# EAGLE board Breakout Board PCB (EAGLE 9.7.0)
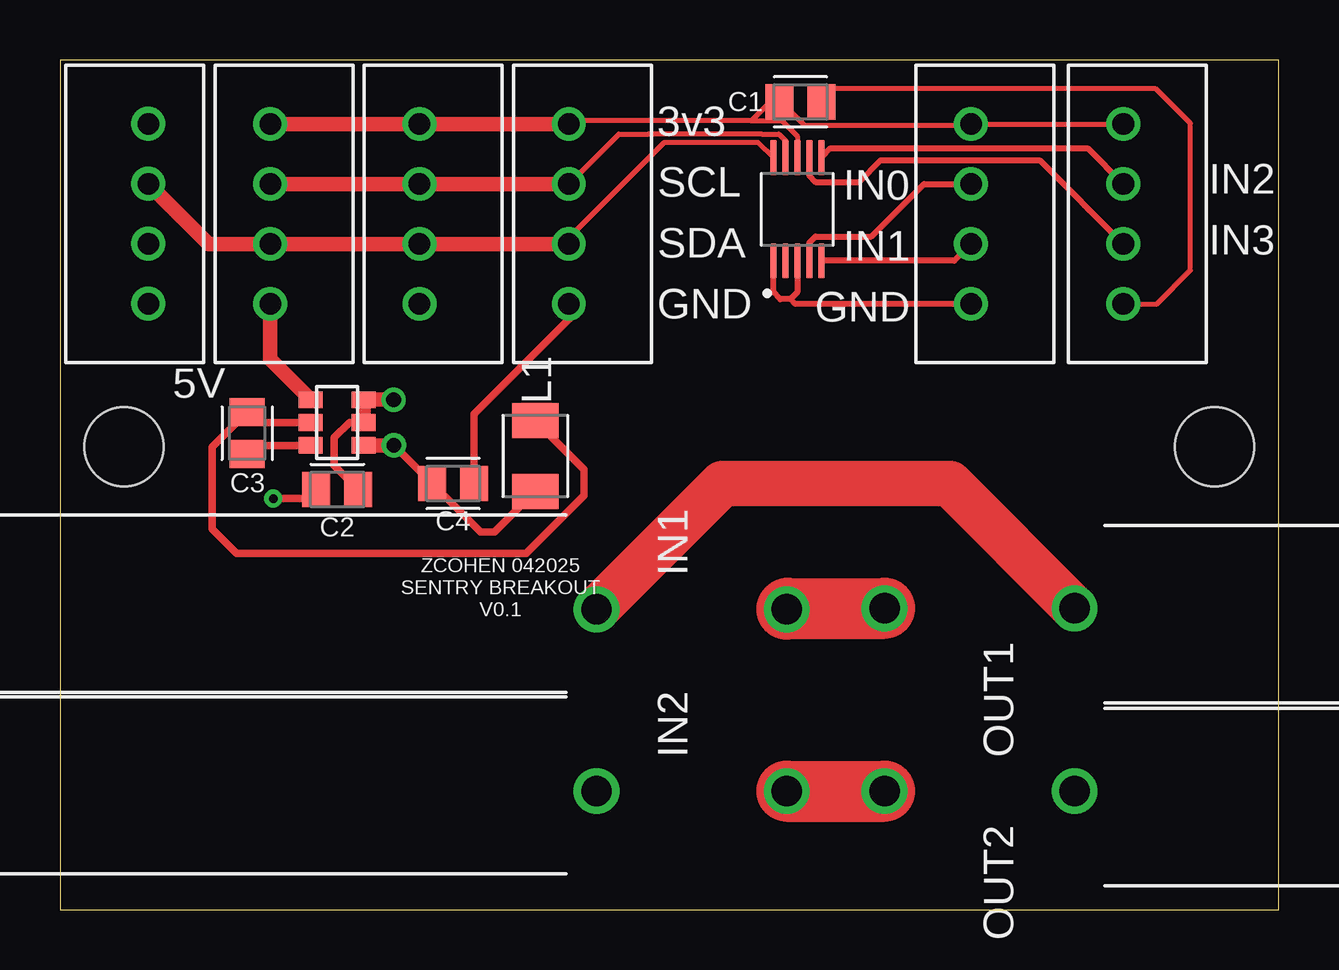
[diagram p0: board, top side]
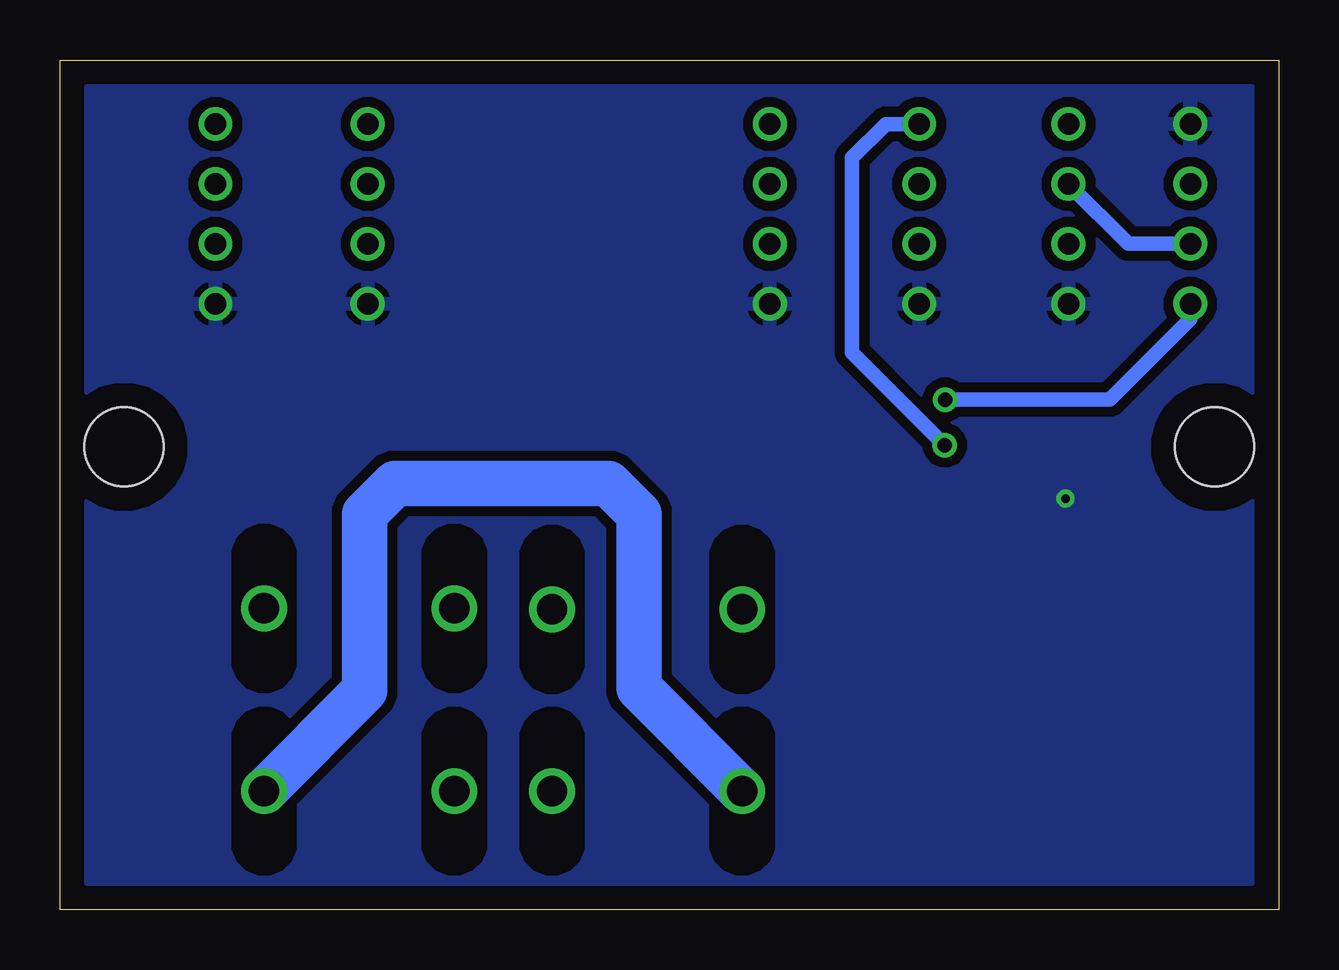
[diagram p1: board, bottom side, seen from below]

Size 50.8 x 35.43 mm. Coordinates in mm from the lower left corner, seen from the top.
Outline: 0,0 50.8,0 50.8,35.43 0,35.43 0,0
Copper layers (1*16): Top / Bottom
Stack-up Default Layer Stack: Top User Defined 0.035mm / Dielectric-1 User Defined 1.5mm / Bottom User Defined 0.035mm
Design rules: minimum copper width 6mil, minimum drill size 0.35mm, copper clearance wire_polygon to wire_polygon 6mil, copper clearance wire_polygon to pad_smd 6mil, copper clearance wire_polygon to via 6mil, copper clearance pad_smd to pad_smd 6mil, copper clearance pad_smd to via 6mil, copper clearance via to via 6mil, copper clearance smd to pad (same net) 6mil, copper clearance smd to via (same net) 6mil, copper clearance smd to smd (same net) 6mil, dimension clearance 40mil, via restrict clearance 0mil, restrict clearance 0mil, drill distance 6mil, keepout clearance 0mil
Holes 3.3 mm at 2.67,19.3 48.13,19.3

## Footprints (pad centres in the part's own frame; a part is rotated, then mirrored left to right if it is on the bottom)
CAPC2012X110 = smd 1.165 x 1.465: 1 -0.875,0; 2 0.875,0
ANDERSONBOARDCONNECTORVERT = drill 1.27 slot 5.588: GND -0.127,-7.925; PWR -0.127,0
B4B-XH-A = drill 0.9: 1 0,0; 2 2.5,0; 3 5,0; 4 7.5,0
INDM3225X240 = smd 1.459 x 1.929: 1 -1.478,0; 2 1.478,0
ADS1115 = smd 1.47 x 0.28: 1 -2.15,1; 2 -2.15,0.5; 3 -2.15,0; 4 -2.15,-0.5; 5 -2.15,-1; 6 2.15,-1; 7 2.15,-0.5; 8 2.15,0; 9 2.15,0.5; 10 2.15,1
AP63203WU-7 = smd 1 x 0.7: BST 1.1,0.95; EN -1.1,0; FB -1.1,0.95; GND 1.1,-0.95; SW 1.1,0; VIN -1.1,-0.95

## Placement (x,y rotation side)
C1  .1uF  [CAPC2012X110]  30.86,33.68 0 top
C2  10uF  [CAPC2012X110]  11.56,17.53 180 top
C3  1uF  [CAPC2012X110]  7.8,19.88 90 top
C4  22uF  [CAPC2012X110]  16.38,17.78 0 top
IN1  ANDERSONBOARDCONNECTORVERTICAL  [ANDERSONBOARDCONNECTORVERT]  22.36,12.66 90 top
IN2  ANDERSONBOARDCONNECTORVERTICAL  [ANDERSONBOARDCONNECTORVERT]  22.36,5.08 90 top
J3  B4B-XH-A  [B4B-XH-A]  3.68,25.27 90 top
J4  B4B-XH-A  [B4B-XH-A]  8.76,32.77 270 top
J5  B4B-XH-A  [B4B-XH-A]  14.99,32.77 270 top
J6  B4B-XH-A  [B4B-XH-A]  21.21,32.77 270 top
J8  B4B-XH-A  [B4B-XH-A]  37.97,32.77 270 top
J9  B4B-XH-A  [B4B-XH-A]  44.32,32.77 270 top
L1  2.2uH  [INDM3225X240]  19.81,18.92 270 top
OUT1  ANDERSONBOARDCONNECTORVERTICAL  [ANDERSONBOARDCONNECTORVERT]  42.29,12.45 270 top
OUT2  ANDERSONBOARDCONNECTORVERTICAL  [ANDERSONBOARDCONNECTORVERT]  42.29,4.83 270 top
U$1  ADS1115  [ADS1115]  30.73,29.21 90 top
U$3  AP63203WU-7  [AP63203WU-7]  11.56,20.32 180 top

## Library data of the parts
C1-C4 = Capacitor; CATEGORY: Capacitor; PACKAGE_SIZE: 0805; PACKAGE_TYPE: SMD; SUBCATEGORY: Ceramic Capacitors; TYPE: MLCC
IN1 IN2 OUT1 OUT2 U$1 U$3 = CohenLibrary
J3-J6 J8 J9 = Connector; CATEGORY: Connectors; DATASHEET: https://www.jst-mfg.com/product/pdf/eng/eXH.pdf; DESCRIPTION: Connector Header Through Hole 4 position 0.098" (2.50mm); MANUFACTURER: JST Sales America Inc.; MPN: B4B-XH-A; OPERATING_TEMPERATURE: -25°C ~ 85°C; PACKAGE_SIZE: NA; PACKAGE_TYPE: Through Hole; PART_STATUS: Active; PITCH: 0.098" (2.50mm); ROHS: Compliant; SERIES: XH; SUBCATEGORY: Rectangular Connectors; TYPE: Male Headers
L1 = Inductor; CATEGORY: Inductors; DESCRIPTION: Molded Body 3.20 X 2.50 X 2.40 mm body 1210(3225-METRIC); PACKAGE_SIZE: 1210; PACKAGE_TYPE: SMD

## Nets
+3.3V: C1.1 C4.1 J4.1 J5.1 J6.1 J8.1 J9.1 L1.2 U$1.8 U$3.FB
+5V: C2.1 J3.1 U$3.EN U$3.VIN
+5V_MOT: IN2.PWR OUT2.PWR
+12V: IN1.PWR OUT1.PWR
AIN0: J8.2 U$1.4
AIN1: J8.3 U$1.5
AIN2: J9.2 U$1.6
AIN3: J9.3 U$1.7
BST: C3.1 U$3.BST
GND: C1.2 C2.2 C4.2 J3.4 J4.4 J5.4 J6.4 J8.4 J9.4 U$1.1 U$1.3 U$3.GND
GND_MOT: IN1.GND OUT1.GND
GND_MOT2: IN2.GND OUT2.GND
I2C_N: J3.3 J4.3 J5.3 J6.3 U$1.10
I2C_P: J3.2 J4.2 J5.2 J6.2 U$1.9
SW: C3.2 L1.1 U$3.SW

## Tracks (layer width: path | path; a pad name or v marks a point on that pad's centre or on a via)
+3.3V  (via drill 0.61)
  Top 0.203: 28.81,32.89 30.1,32.89 | 28.81,32.89 21.34,32.89 J6.1 | 30.1,32.89 30.73,32.26 U$1.8 | 28.81,32.89 29.99,34.06 29.99,33.76 31.05,32.7 37.91,32.7 J8.1 J9.1 | 30.1,32.89 30.1,33.57 C1.1
  Top 0.305: v13.92,19.37 C4.1 17.54,15.75 18.11,15.75 L1.2
  Top 0.61: v13.92,19.37 U$3.FB | J4.1 J5.1 J6.1
  Bottom 0.61: v13.92,19.37 17.78,23.23 17.78,31.37 16.38,32.77 J5.1
+5V  (via drill 0.61)
  Top 0.305: C2.1 11.43,18.53 11.43,19.69 12.06,20.32 U$3.EN
  Top 0.61: U$3.EN U$3.VIN 13.78,21.27 13.84,21.21 v13.91,21.27
  Bottom 0.61: v13.91,21.27 7.05,21.27 3.68,24.64 J3.1
+5V_MOT
  Bottom 1.905: IN2.PWR 26.67,9.26 26.67,16.51 27.94,17.78 36.83,17.78 38.1,16.51 38.1,9.14 OUT2.PWR
+12V
  Top 1.905: OUT1.PWR 37.08,17.78 27.61,17.78 IN1.PWR
AIN0
  Top 0.203: U$1.4 31.23,27.77
  Top 0.254: J8.2 36.01,30.27 33.82,28.07 31.5,28.07 31.23,27.81 31.23,27.77
AIN1
  Top 0.254: U$1.5 37.27,27.06 J8.3
AIN2
  Top 0.254: J9.2 42.84,31.75 32.12,31.75 U$1.6
AIN3
  Top 0.203: U$1.7 31.23,30.65
  Top 0.254: 31.23,30.65 31.23,30.61 31.5,30.35 33.3,30.35 34.21,31.25 40.84,31.25 J9.3
BST
  Top 0.305: C3.1 8.17,19.37 U$3.BST
GND  (via drill 0.35)
  Top 0.203: J9.4 45.71,25.27 47.12,26.67 47.12,32.79 45.68,34.23 32.28,34.23 C1.2
  Top 0.254: U$1.1 29.73,25.75 30.02,25.46 30.45,25.46 | U$1.3 30.73,25.75 30.45,25.46 | J8.4 30.64,25.27 30.45,25.46
  Top 0.305: C4.2 17.26,20.68 21.21,24.63 J6.4 | C2.2 10.3,17.14 v8.89,17.14
  Top 0.61: U$3.GND 8.76,22.96 J4.4
  pour Bottom (isolate 0.406): 0,0 0,35.56 50.8,35.56 50.8,0
GND_MOT
  Top 2.54: IN1.GND 30.33,12.57 OUT1.GND
GND_MOT2
  Top 2.54: IN2.GND OUT2.GND
I2C_N
  Top 0.203: U$1.10 29.1,32 25.18,32 21.21,28.02 J6.3
  Top 0.61: J6.3 J5.3 J4.3 6.19,27.77 J3.3
I2C_P
  Top 0.203: J6.2 23.29,32.35 24.53,32.35 29.25,32.35 29.96,32.35 30.25,32.05 30.25,31.38 U$1.9
  Top 0.61: J4.2 J5.2 J6.2
  Bottom 0.61: J4.2 6.27,27.77 J3.2
SW
  Top 0.305: C3.2 8.08,20.75 8.51,20.32 U$3.SW | C3.2 | C3.2 6.35,19.3 6.35,15.88 7.37,14.86 19.43,14.86 21.84,17.27 21.84,18.37 L1.1

## Text on the board
SilkscreenTop: 3v3 | IN0 | SCL | IN2 | IN1 | SDA | IN3 | GND | GND | 5V | ZCOHEN 042025 / SENTRY BREAKOUT / V0.1